# Altium PCB DIOT_Template.PcbDoc (part 3 of 4)
Units mm, origin at the board's own origin, x right, y up, seen from the top; angles counter-clockwise.
Board outline 222.9 x 100 mm, 4 copper layers (L1, P2, P3, L4), stack 1.546 mm thick; 233 components, 184 nets, 1067 pads, 325 vias.
Unrouted connection lines stored in the file: 423.
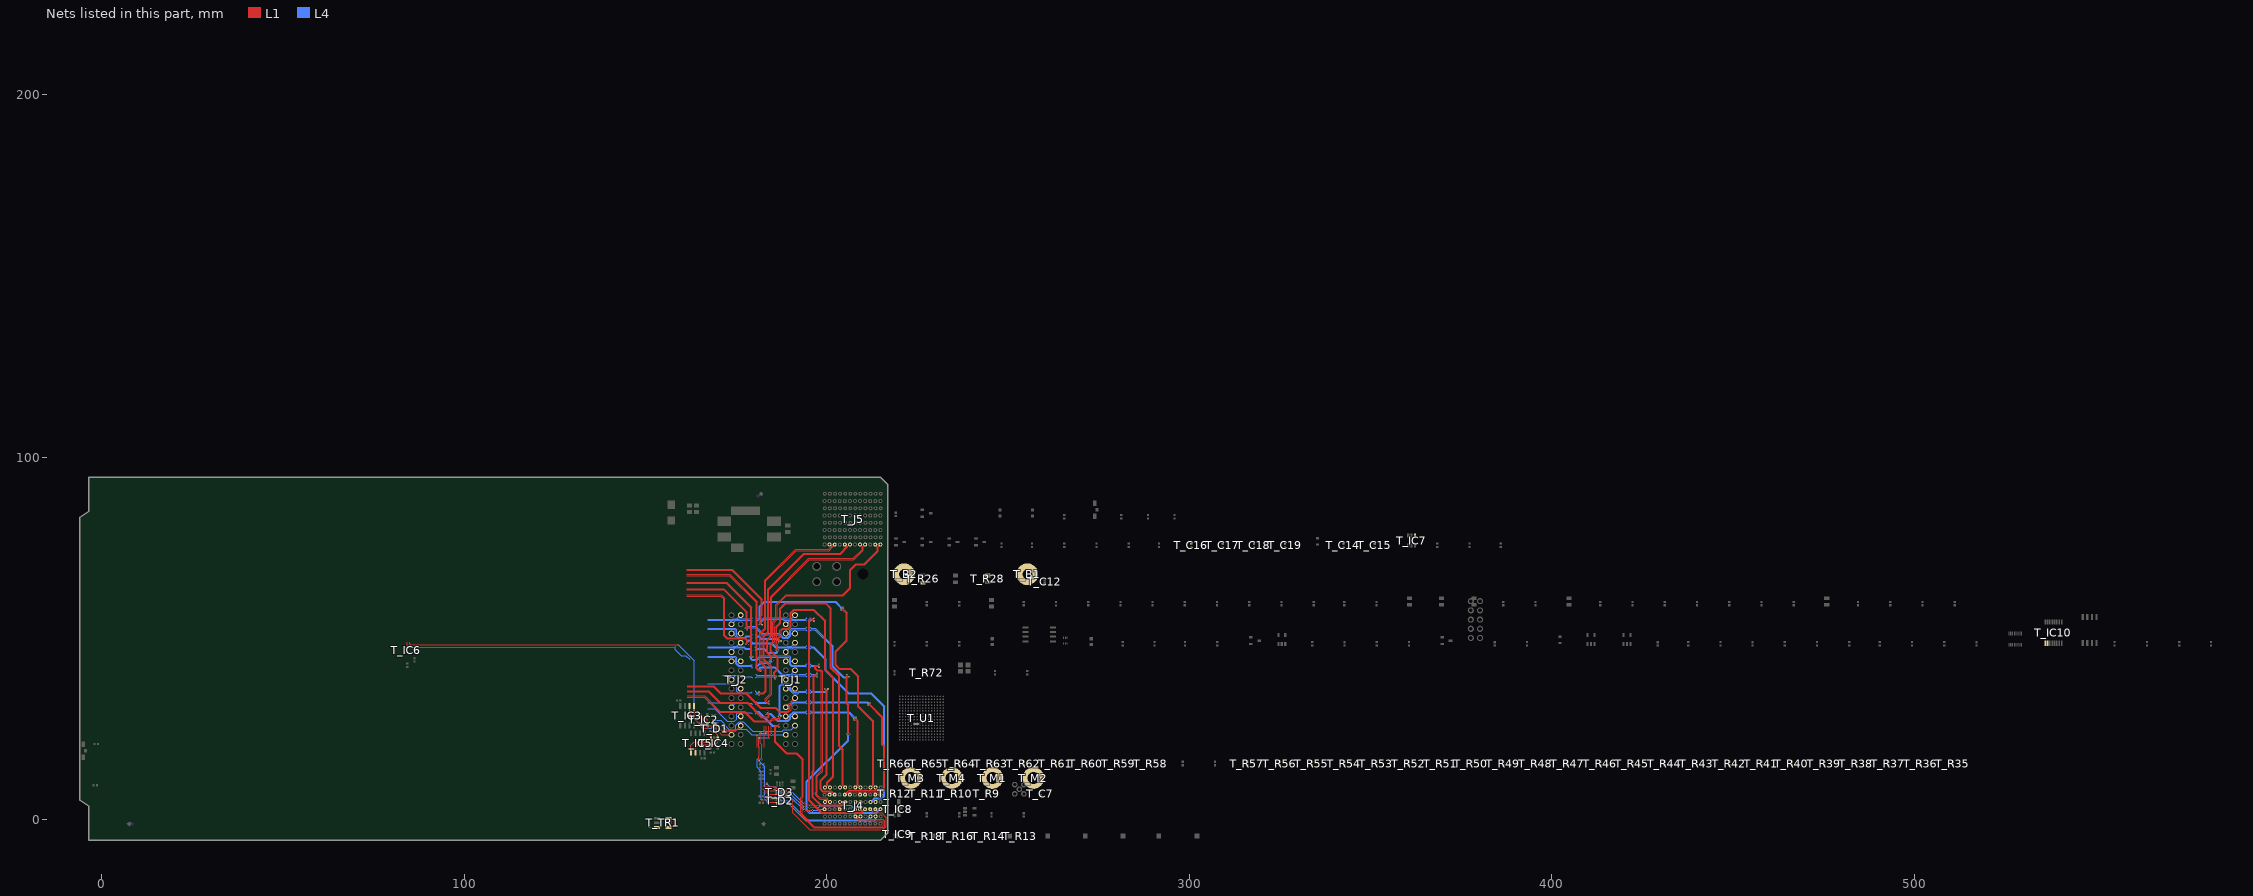
[diagram p4: the nets of this part, all layers, seen from the top]

## Via types
v1: diameter 0.5, hole 0.25, L1 to L4, tented both sides, 289 vias
v2: diameter 1, hole 0.45, L1 to L4, tented both sides, 28 vias
v3: diameter 0.9, hole 0.45, L1 to L4, tented both sides, 5 vias
v4: diameter 0.6, hole 0.3, L1 to L4, tented both sides, 3 vias

## Nets (pads, with @x,y where several pads share a name; then routed paths per layer and width w, separated by ;. In a path a pad name is that pad's centre, name@x,y a point inside that pad or via, vN(x,y) a via of type N, cw(c..) or ccw(c..) an arc to the next point about the centre after c; other vN are vias at no path point) (continued)
BP_IO.LVDS_P7: T_J4.E6 T_R42.1 | length 33.2
  L1 w0.14: v1(208.094,28.236) 208.111,28.219 208.111,27.883 208.751,27.243 208.751,18.384 208.751,9.5 T_J4.E6@209.3,8.95
  L4 w0.14: 195.47,30.134 195.47,30.114 195.77,29.814 206.18,29.814 207.74,28.253 208.076,28.253 v1(208.094,28.236)
BP_IO.LVDS_P8: T_J4.B6 T_R43.1 | length 86.5
  L1 w0.14: v1(204.536,58.536) 204.553,58.519 204.553,58.183 205.659,57.077 205.659,49.406 202.6,46.347 202.6,42.721 203.521,41.8 206.681,41.8 208.9,39.581 208.9,31.3 212.951,27.249 212.951,9.5 T_J4.B6@213.5,8.95
  L4 w0.14: 180.47,55.74 180.47,55.72 180.77,55.42 181.029,55.42 181.386,55.778 181.386,58.9 182.775,60.288 202.447,60.288 204.182,58.554 204.518,58.554 v1(204.536,58.536)
BP_IO.LVDS_P9: T_J4.K6 T_R44.1 | length 77.6
  L1 w0.14: v1(186.8,48.9) 186.781,48.919 186.781,49.251 186.577,49.456 186.577,50.301 187.1,50.824 187.1,52.24 187.73,52.87 189.37,52.87 189.9,53.4 189.9,57.185 190.876,58.161 196.439,58.161 199.695,54.905 199.695,41.505 202,39.2 202,11.881 200.351,10.232 200.351,9.5 T_J4.K6@200.9,8.95
  L4 w0.14: 180.37,50.2 180.37,50.22 180.67,50.52 181.156,50.52 181.876,49.8 186.276,49.8 186.803,49.273 186.803,48.903 v1(186.8,48.9)
BP_IO.LVDS_P10: T_J4.H6 T_R45.1 | length 86
  L1 w0.14: v1(186.025,46.8) 186.025,46.825 186.263,47.062 186.263,48.073 185.865,48.471 185.865,53.189 187,54.324 187,58.324 188.564,59.888 199.801,59.888 201.29,58.399 201.29,42.01 203.6,39.7 203.6,20.4 204.55,19.45 204.55,9.409 205.009,8.95 T_J4.H6@205.1,8.95
  L4 w0.14: 180.264,47.701 180.264,47.681 180.561,47.384 182.716,47.384 182.892,47.208 183.8,46.3 186.176,46.3 186.263,46.387 186.263,46.538 186.025,46.775 v1(186.025,46.8)
BP_IO.LVDS_P11: T_J5.D1 T_R46.1 | length 56.5
  L1 w0.14: v1(185.045,43.885) 185.045,43.942 184.839,44.147 184.839,45.058 183.707,46.189 183.707,49.607 184.8,50.7 184.8,61.4 195.2,71.8 207.452,71.8 210.051,74.399 210.051,75.387 210.051,75.503 210.498,75.95 T_J5.D1@210.6,75.95
  L4 w0.14: 180.366,41.988 180.366,42.016 180.59,42.24 180.618,42.24 180.729,42.351 181.051,42.351 181.968,43.268 184.433,43.268 v1@185.045,43.88
BP_IO.LVDS_P12: T_J5.A1 T_R47.1 | length 67.1
  L1 w0.14: v1(186.248,39.548) 186.179,39.617 185.914,39.617 185.7,39.831 185.7,40.6 186.6,41.5 186.6,44.743 184.7,46.643 184.7,48.3 185.47,49.07 185.47,54.565 186.3,55.395 186.3,59.2 188.9,61.8 204.5,61.8 206.6,63.9 206.6,68.9 208.1,70.4 210.5,70.4 214.251,74.151 214.251,75.4 T_J5.A1@214.801,75.95
  L4 w0.14: 180.378,40.132 180.378,40.112 180.666,39.825 185.635,39.825 185.895,39.565 186.231,39.565 v1(186.248,39.548)
BP_IO.LVDS_P13: T_J5.J1 T_R48.1 | length 58.4
  L1 w0.14: v1(181.32,34.528) 181.344,34.528 181.582,34.766 182.651,34.766 183.388,35.503 183.388,42.136 181.9,43.624 181.9,51.4 183.2,52.7 183.2,65.928 191.567,74.295 200.645,74.295 201.651,75.301 201.651,75.541 202.06,75.95 T_J5.J1@202.2,75.95
  L4 w0.14: 180.378,34.671 180.583,34.671 180.678,34.766 181.058,34.766 181.295,34.528 v1(181.32,34.528)
BP_IO.LVDS_P14: T_J5.G1 T_R49.1 | length 65.2
  L1 w0.14: v1(184.179,32.75) 184.094,32.75 184.094,32.688 183.906,32.5 183.593,32.5 183.4,32.693 183.4,33.273 184.783,34.656 184.783,42.341 182.8,44.324 182.8,50.5 184,51.7 184,63.5 193.8,73.3 203.85,73.3 205.851,75.301 205.851,75.541 206.26,75.95 T_J5.G1@206.401,75.95
  L4 w0.14: 180.5,32.664 180.652,32.512 183.917,32.512 184.155,32.75 v1(184.179,32.75)
BP_IO.LVDS_P15: T_J4.E2 T_R50.2 | length 73.5
  L1 w0.14: v1(186.9,26.375) 186.875,26.375 186.638,26.137 186.088,26.137 185.659,25.709 185.659,21.416 188.861,18.215 191.603,18.215 193.2,16.618 193.2,6.524 192.902,6.227 192.902,1.365 192.99,1.277 196.082,-1.815 ; 196.083,-1.816 196.437,-2.17 215.541,-2.17 215.946,-1.764 215.946,-0.322 215.497,0.127 208.925,0.127 208.75,0.302 208.75,0.541 209.159,0.95 T_J4.E2@209.3,0.95
  L4 w0.14: 180.417,30.074 180.629,30.074 180.677,30.025 180.677,30.017 180.759,29.935 181.289,29.935 185.087,26.137 186.638,26.137 186.875,26.375 v1(186.9,26.375)
BP_MGT.Rx_N: T_J4.E5
BP_MGT.Rx_P: T_J4.D5
BP_MGT.Tx_N: T_J4.B5
BP_MGT.Tx_P: T_J4.A5
CHASSIS: T_B1.1 T_B2.1 T_C12.1 T_M1.1 T_M2.1 T_M3.1 T_M4.1 T_R26.1 T_R28.2
CLK_25MHz: T_R72.2 T_U1.K9
CT: T_C14.2 T_C15.2 T_C16.2 T_C17.2 T_C18.2 T_C19.2 T_IC7.4
EEM0_I2C.SCL: T_D1.3 T_IC2.1 T_IC3.6 T_IC6.1 T_IC8.3 T_IC9.6 T_IC10.2 T_J1.27 | length 120.9
  L1 w0.125: 84.324,48.983 84.324,47.976 84.624,47.676 v1(158.217,47.676) ; T_IC3.6@162.163,31.417 162.163,29.94 v1(162.161,29.938) 162.161,29.289 164.736,26.714 164.913,26.714 165.387,26.239 165.387,25.694 165.78,25.302 167.198,25.302 v1(167.2,25.3) ; 169.6,25.96 169.6,26.609 169.937,26.946 v1(169.961,26.946) ; 169.605,25.965 170.641,25.965 v1(170.658,25.982) ; 180.792,19.985 180.812,20.005 v1(180.811,23.497) v1(180.811,23.497) ; 184.692,25.785 184.698,25.78 v1(184.698,23.52)
  L4 w0.125: v1(158.217,47.676) 158.217,46.983 159.9,45.3 161.1,45.3 162.161,44.239 ; v1(167.2,25.3) 168.2,25.3 169.719,26.819 169.732,26.819 169.859,26.946 v1(169.961,26.946) ; v1@170.658,26.034 v1(170.658,25.982) 171.079,25.982 172.537,24.524 174.875,24.524 175.288,24.938 176.269,24.938 ccw(c176.27,26) 176.271,24.938 177.862,24.938 179.31,23.49 180.804,23.49 v1(180.811,23.497) 184.675,23.497 v1(184.698,23.52) 184.759,23.46 T_J1.27@188.73,23.46
EEM0_I2C.SDA: T_D1.1 T_IC2.3 T_IC3.5 T_IC6.6 T_IC8.2 T_IC9.7 T_IC10.1 T_J1.26 | length 138.9
  L1 w0.125: 84.97,48.987 84.97,48.473 85.132,48.311 v1(159.03,48.311) ; T_IC3.5@163.433,31.417 163.433,29.933 v1(163.4,29.9) 163.4,29.3 164.6,28.1 166.6,28.1 167.05,27.65 167.05,26.155 167.287,25.917 168.5,25.917 ; 168.6,25.96 168.587,25.973 168.587,27.48 v1(168.63,27.523) ; 182.742,19.985 182.768,20.011 v1(182.768,24.511) 182.768,25.76 182.742,25.785
  L4 w0.125: v1(159.03,48.311) 163.416,43.924 v1@163.416,29.9 ; v1(163.4,29.9) v1@163.416,29.916 ; v1(168.63,27.523) 168.643,27.51 170.79,27.51 172,26.3 172,25.962 173.062,24.9 174.6,24.9 174.9,25.2 174.9,26.133 175.88,27.113 176.987,27.113 179.614,24.486 182.768,24.486 187.8,24.486 188.214,24.9 190.17,24.9 T_J1.26@191.27,26
EEM1_I2C.SCL: T_D1.6 T_IC4.1 T_IC5.6 T_J2.27 | length 16
  L1 w0.15: T_IC5.6@163.799,18.475 163.799,19.799 164.81,20.81 169.41,20.81 169.95,21.35 T_IC4.1@169.95,22.5 169.95,23.348 169.599,23.699 169.599,24.484 170.065,24.484 171.089,23.46 T_J2.27@173.73,23.46
EEM1_I2C.SDA: T_D1.4 T_IC4.3 T_IC5.5 T_J2.26 | length 20.7
  L1 w0.15: T_IC5.5@162.529,18.475 162.529,20.629 163.3,21.4 167.159,21.4 167.784,22.025 167.825,22.025 168.05,22.25 168.05,23.244 168.596,23.791 T_D1.4@168.596,24.436 ; v1(167.9,24.5) 167.946,24.454 168.586,24.454 T_D1.4@168.6,24.44 ; v1(170.6,25) 170.689,25 170.945,24.744 175.014,24.744 T_J2.26@176.27,26
  L4 w0.15: v1(167.9,24.5) 170.1,24.5 v1(170.6,25)
EEM_CLK_N: T_R10.2 T_TR1.1 | length 1.8
  L1 w0.14: T_TR1.1@156.39,0.47 156.691,0.169 157.681,0.169 157.93,-0.08 157.93,-0.1
EEM_CLK_P: T_R9.2 T_TR1.3 | length 1.8
  L1 w0.14: T_TR1.3@156.39,-2.07 156.835,-2.07 157.193,-1.712 157.638,-1.712 157.93,-1.42 157.93,-1.4
EEM_CLK_SE: T_C7.1 T_TR1.4 | length 2.3
  L1 w0.14: 150.87,-2.07 T_TR1.4@153.21,-2.07
EEM_IO.LVDS_N0: T_J1.3 T_R51.2 | length 47.3
  L1 w0.14: 161.4,69.196 173.904,69.196 182.2,60.9 182.2,56.5 181.937,56.237 181.937,54.062 182.175,53.825 v1(182.175,53.8)
  L4 w0.14: v1(182.175,53.8) 182.175,53.825 181.937,54.062 181.937,54.537 182.795,55.395 187.878,55.395 188.163,55.11 189.868,55.11 189.971,55.007 ; T_J1.3@188.73,53.94 188.904,53.94 189.971,55.007 ; 194.53,54.9 194.45,54.9 194.258,55.092 193.392,55.092 190.056,55.092 189.971,55.007
EEM_IO.LVDS_N1: T_J1.6 T_R52.2 | length 46.6
  L1 w0.14: 161.4,63.785 171.662,63.785 178.117,57.33 178.117,53.512 178.306,53.323 178.306,52.959 178.112,52.764 178.112,52.428 v1(178.094,52.411)
  L4 w0.14: v1(178.094,52.411) 178.112,52.428 178.112,52.764 178.397,53.05 180.35,53.05 182.279,51.121 186.779,51.121 187.848,50.052 189.412,50.052 190.15,50.79 190.15,51.318 190.232,51.4 T_J1.6@191.27,51.4 191.262,51.408 190.342,51.408 190.15,51.6 190.15,52.15 190.493,52.493 194.257,52.493 194.53,52.22 194.53,52.2
EEM_IO.LVDS_N2: T_J1.9 T_R53.2 | length 48.9
  L1 w0.14: 161.4,62.048 170.943,62.048 171.852,61.139 171.852,50.978 172.53,50.3 177.524,50.3 178.263,49.562 178.263,48.862 178.5,48.625 v1(178.5,48.6)
  L4 w0.14: v1(178.5,48.6) 178.5,48.625 178.263,48.862 178.263,49.192 178.461,49.39 178.733,49.39 179.523,48.6 184.676,48.6 185.786,47.49 189.306,47.49 189.44,47.624 189.754,47.624 189.836,47.542 189.836,47.426 ; T_J1.9@188.73,46.32 189.836,47.426 ; 194.53,47.3 194.439,47.3 194.239,47.5 190.73,47.5 190.486,47.256 190.122,47.256 189.952,47.426 189.836,47.426
EEM_IO.LVDS_N3: T_J1.12 T_R54.2 | length 54.5
  L1 w0.14: 161.4,65.581 172.406,65.581 179.339,58.648 179.339,45.22 179.553,45.006 v1(179.553,44.958)
  L4 w0.14: v1(179.553,44.958) 179.553,44.933 179.315,44.696 179.315,44.37 179.397,44.288 180.764,44.288 181.687,45.212 189.727,45.212 190.1,44.838 190.1,43.915 190.225,43.79 ; T_J1.12@191.27,43.78 190.182,43.78 190.1,43.698 190.1,42.9 190.3,42.7 194.172,42.7 194.232,42.76 194.31,42.76 194.53,42.98 194.53,43 194.53,43.08
EEM_IO.LVDS_N4: T_J1.15 T_R55.2 | length 59.3
  L1 w0.14: 161.4,67.7 173.284,67.7 180.818,60.166 180.818,41.864 181.222,41.46 181.8,41.46 181.995,41.265 182.331,41.265 v1(182.348,41.248)
  L4 w0.14: v1(182.348,41.248) 182.331,41.265 181.995,41.265 181.8,41.46 181.719,41.46 181.637,41.542 181.637,41.689 181.84,41.892 185.608,41.892 187.666,39.834 189.584,39.834 189.666,39.752 189.666,39.636 ; T_J1.15@188.73,38.7 189.666,39.636 ; 194.53,39.5 194.53,39.52 194.25,39.8 193.781,39.8 190.65,39.8 190.486,39.636 190.122,39.636 189.952,39.806 189.836,39.806 189.666,39.636
EEM_IO.LVDS_N5: T_J1.18 T_R56.2 | length 48.7
  L1 w0.14: 161.481,34.188 166.312,34.188 170.49,30.01 177.39,30.01 180,27.4 184.4,27.4 184.967,27.967 186.808,27.967 186.863,28.022 186.863,28.26 186.62,28.502 v1(186.62,28.6)
  L4 w0.14: v1(186.62,28.6) 186.62,28.619 186.863,28.862 186.863,36.987 187.476,37.6 189.624,37.6 190.15,37.074 190.15,36.242 190.232,36.16 ; T_J1.18@191.27,36.16 190.232,36.16 ; 194.53,35.84 194.53,35.82 194.23,35.52 192.256,35.52 191.886,35.15 190.852,35.15 190.15,35.852 190.15,36.078 190.232,36.16
EEM_IO.LVDS_N6: T_J1.21 T_R57.2 | length 41.6
  L1 w0.14: 161.481,37 168.824,37 170.734,35.09 177.81,35.09 181.79,31.11 185.914,31.11 187.098,29.927 189.296,29.927 189.859,30.49 189.859,31.607 190.034,31.781 190.034,32.104 189.952,32.186 189.836,32.186 T_J1.21@188.73,31.08
  L4 w0.14: T_J1.21@188.73,31.08 189.836,32.186 189.952,32.186 190.122,32.016 190.693,32.016 190.977,32.3 194.25,32.3 194.53,32.02 194.53,32
EEM_IO.LVDS_N7: T_J1.24 T_R58.2 | length 41.7
  L1 w0.14: 161.481,35.6 167.5,35.6 170.65,32.45 176.838,32.45 176.888,32.4 178.2,32.4 182.1,28.5 183.8,28.5 183.898,28.598 183.898,28.999 183.577,29.32 183.206,29.32 v1(183.2,29.314)
  L4 w0.14: v1(183.2,29.314) 183.219,29.295 183.602,29.295 183.754,29.143 184.432,29.143 184.719,28.856 186.422,27.154 189.427,27.154 190.15,27.877 190.15,28.458 190.232,28.54 ; T_J1.24@191.27,28.54 190.232,28.54 ; 194.53,29.194 194.53,29.232 194.212,29.55 190.852,29.55 190.15,28.848 190.15,28.622 190.232,28.54
EEM_IO.LVDS_N8: T_J2.3 T_R59.2 | length 14.2
  L4 w0.14: 167.2,55.056 174.244,55.056 174.353,55.165 174.74,55.165 174.845,55.06 174.845,54.936 ; T_J2.3@173.73,53.94 173.849,53.94 174.845,54.936 ; 179.464,54.889 179.461,54.889 179.221,55.129 175.946,55.129 175.817,55 175.156,55 175.112,55.044 174.953,55.044 174.845,54.936
EEM_IO.LVDS_N9: T_J2.6 T_R60.2 | length 15.6
  L4 w0.14: 167.2,52.87 174.744,52.87 175.158,52.456 175.158,51.474 175.232,51.4 ; T_J2.6@176.27,51.4 175.232,51.4 ; 179.43,51.14 179.43,51.12 179.21,50.9 179.194,50.9 179.117,50.822 177.77,50.822 177.367,50.419 175.557,50.419 175.144,50.831 175.144,51.312 175.232,51.4
EEM_IO.LVDS_N10: T_J2.9 T_R61.2 | length 14.2
  L4 w0.14: 167.2,47.49 174.298,47.49 174.431,47.624 174.752,47.624 174.836,47.54 174.836,47.464 ; T_J2.9@173.73,46.32 174.836,47.426 174.836,47.464 ; 179.337,46.761 179.337,46.781 179.016,47.102 177.474,47.102 177.157,47.419 175.075,47.419 175.03,47.464 174.836,47.464
EEM_IO.LVDS_N11: T_J2.12 T_R62.2 | length 15.4
  L4 w0.14: 167.2,45.2 174.79,45.2 175.187,44.803 175.187,43.855 175.262,43.78 ; T_J2.12@176.27,43.78 175.262,43.78 ; 179.426,42.723 179.233,42.723 179.13,42.62 177.18,42.62 177.154,42.646 175.71,42.646 175.18,43.176 175.18,43.698 175.262,43.78
EEM_IO.LVDS_N12: T_J2.15 T_R63.2 | length 11.8
  L4 w0.14: 171.311,39.847 174.567,39.847 174.649,39.765 174.649,39.649 173.876,38.876 ccw(c173.975,38.777) T_J2.15@173.867,38.866 ; T_J2.15@173.729,38.729 173.435,38.729 173.569,38.863 T_J2.15@173.863,38.863 ; T_J2.15@173.73,38.7 174.879,39.849 177.158,39.849 177.482,39.525 179.151,39.525 179.438,39.238 179.438,39.218
EEM_IO.LVDS_N13: T_J2.18 T_R64.2 | length 15.4
  L4 w0.14: 167.2,37.548 174.7,37.548 175.15,37.098 175.15,36.266 175.283,36.133 ; T_J2.18@176.27,36.16 175.31,36.16 175.283,36.133 ; 179.438,35.341 179.156,35.058 175.566,35.058 175.166,35.458 175.166,36.016 175.283,36.133
EEM_IO.LVDS_N14: T_J2.21 T_R65.2 | length 14
  L4 w0.14: 167.2,32.25 174.587,32.25 174.669,32.168 174.669,32.019 T_J2.21@173.73,31.08 ; 174.703,32.053 174.829,32.179 179.098,32.179 179.137,32.14 179.21,32.14 179.464,31.886 179.464,31.77
EEM_IO.LVDS_N15: T_J2.24 T_R66.1 | length 16.9
  L4 w0.14: 167.2,30.6 169.113,30.6 172.576,27.137 174.531,27.137 175.15,27.757 175.15,28.458 175.232,28.54 ; T_J2.24@176.27,28.54 175.232,28.54 ; 179.489,29.261 179.489,29.361 179.25,29.6 175.516,29.6 175.15,29.234 175.15,28.622 175.232,28.54
EEM_IO.LVDS_P0: T_J1.2 T_R35.2 | length 47.1
  L1 w0.14: 161.4,68.896 173.78,68.896 181.9,60.776 181.9,56.624 181.638,56.362 181.638,54.062 181.4,53.825 v1(181.4,53.8)
  L4 w0.14: v1(181.4,53.8) 181.4,53.825 181.638,54.062 181.638,54.662 182.671,55.695 188.002,55.695 188.287,55.41 190.2,55.41 190.387,55.596 ; T_J1.2@191.27,56.48 190.387,55.596 ; 194.53,55.7 194.53,55.68 194.31,55.46 194.21,55.46 194.142,55.392 190.469,55.392 190.387,55.474 190.387,55.596
EEM_IO.LVDS_P1: T_J1.5 T_R36.2 | length 46.1
  L1 w0.14: 161.4,63.485 171.538,63.485 177.817,57.206 177.817,53.388 178.006,53.199 178.006,53.083 177.899,52.976 177.564,52.976 v1(177.546,52.959)
  L4 w0.14: v1(177.546,52.959) 177.564,52.976 177.899,52.976 178.273,53.35 180.474,53.35 182.403,51.421 186.903,51.421 187.973,50.352 189.287,50.352 189.85,50.914 189.85,51.318 189.768,51.4 T_J1.5@188.73,51.4 188.738,51.408 189.658,51.408 189.85,51.6 189.85,52.274 190.369,52.793 194.243,52.793 194.53,53.08 194.53,53.1
EEM_IO.LVDS_P2: T_J1.8 T_R37.2 | length 48.9
  L1 w0.14: 161.4,61.748 170.819,61.748 171.552,61.015 171.552,50.854 172.405,50 177.4,50 177.963,49.437 177.963,48.889 ; v1(177.725,48.6) 177.725,48.625 177.963,48.862
  L4 w0.14: v1(177.725,48.6) 177.725,48.625 177.963,48.862 177.963,49.316 178.337,49.69 178.857,49.69 179.647,48.9 184.8,48.9 185.91,47.79 189.182,47.79 189.316,47.924 189.878,47.924 190.048,47.754 190.164,47.754 ; T_J1.8@191.27,48.86 190.164,47.754 ; 194.53,48.08 194.53,48.069 194.261,47.8 190.606,47.8 190.362,47.556 190.246,47.556 190.164,47.638 190.164,47.754
EEM_IO.LVDS_P3: T_J1.11 T_R38.2 | length 54.2
  L1 w0.14: 161.4,65.281 172.282,65.281 179.039,58.524 179.039,45.22 v1(178.778,44.958)
  L4 w0.14: v1(178.778,44.958) 178.778,44.933 179.015,44.696 179.015,44.246 179.273,43.988 180.888,43.988 181.812,44.912 189.602,44.912 189.8,44.714 189.8,43.884 189.696,43.78 ; T_J1.11@188.73,43.78 189.696,43.78 ; 194.53,42.2 194.45,42.2 194.25,42.4 190.176,42.4 189.8,42.776 189.8,43.676 189.696,43.78
EEM_IO.LVDS_P4: T_J1.14 T_R39.2 | length 59.8
  L1 w0.14: 161.4,67.4 173.16,67.4 180.518,60.042 180.518,41.74 181.098,41.16 181.676,41.16 181.783,41.053 181.783,40.717 v1(181.8,40.7)
  L4 w0.14: v1(181.8,40.7) 181.783,40.717 181.783,41.053 181.676,41.16 181.595,41.16 181.337,41.418 181.337,41.813 181.716,42.192 185.732,42.192 187.79,40.134 190.164,40.134 ; T_J1.14@191.27,41.24 190.164,40.134 ; 194.53,40.4 194.53,40.38 194.25,40.1 193.905,40.1 190.526,40.1 190.362,39.936 190.246,39.936 190.164,40.018 190.164,40.134
EEM_IO.LVDS_P5: T_J1.17 T_R40.2 | length 48.7
  L1 w0.14: 161.481,33.888 166.188,33.888 170.366,29.71 177.266,29.71 179.876,27.1 184.524,27.1 185.092,27.667 186.933,27.667 187.162,27.897 187.163,28.301 187.394,28.533 v1(187.394,28.63)
  L4 w0.14: v1(187.394,28.63) 187.394,28.661 187.163,28.892 187.163,36.863 187.6,37.3 189.5,37.3 189.85,36.95 189.85,36.242 189.768,36.16 ; T_J1.17@188.73,36.16 189.768,36.16 ; 194.53,34.9 194.53,34.92 194.23,35.22 192.381,35.22 192.011,34.85 190.727,34.85 189.85,35.727 189.85,36.078 189.768,36.16
EEM_IO.LVDS_P6: T_J1.20 T_R41.2 | length 42.1
  L1 w0.14: 161.481,36.7 168.7,36.7 170.61,34.79 177.686,34.79 181.666,30.81 185.79,30.81 186.973,29.627 189.42,29.627 190.159,30.365 190.159,31.482 190.334,31.657 190.334,32.228 190.164,32.398 190.164,32.514 T_J1.20@191.27,33.62
  L4 w0.14: T_J1.20@191.27,33.62 190.164,32.514 190.164,32.398 190.246,32.316 190.569,32.316 190.853,32.6 194.25,32.6 194.53,32.88 194.53,32.9
EEM_IO.LVDS_P7: T_J1.23 T_R42.2 | length 42.1
  L1 w0.14: 161.481,35.3 167.376,35.3 170.526,32.15 176.713,32.15 176.763,32.1 178.076,32.1 181.976,28.2 183.924,28.2 184.198,28.474 184.198,29.123 183.796,29.525 183.796,29.814 v1(183.755,29.855)
  L4 w0.14: v1(183.755,29.855) 183.796,29.814 183.796,29.525 183.878,29.443 184.557,29.443 184.9,29.1 186.546,27.454 189.302,27.454 189.85,28.002 189.85,28.458 189.768,28.54 ; T_J1.23@188.73,28.54 189.768,28.54 ; 194.53,30.134 194.53,30.132 194.248,29.85 190.727,29.85 189.85,28.973 189.85,28.622 189.768,28.54
EEM_IO.LVDS_P8: T_J2.2 T_R43.2 | length 14.3
  L4 w0.14: 167.2,55.356 174.119,55.356 174.229,55.465 174.864,55.465 174.947,55.382 175.198,55.382 ; T_J2.2@176.27,56.48 176.218,56.48 175.198,55.46 175.198,55.382 ; 179.464,55.809 179.464,55.654 179.31,55.5 179.299,55.5 179.228,55.429 175.822,55.429 175.693,55.3 175.28,55.3 175.198,55.382
EEM_IO.LVDS_P9: T_J2.5 T_R44.2 | length 15.6
  L4 w0.14: 167.2,52.57 174.62,52.57 174.844,52.346 174.844,51.476 174.768,51.4 ; T_J2.5@173.73,51.4 174.768,51.4 ; 179.438,50.188 179.438,50.212 179.21,50.44 179.194,50.44 179.112,50.522 177.894,50.522 177.491,50.119 175.432,50.119 174.844,50.707 174.844,51.324 174.768,51.4
EEM_IO.LVDS_P10: T_J2.8 T_R45.2 | length 14.1
  L4 w0.14: 167.2,47.79 174.173,47.79 174.307,47.924 174.876,47.924 174.948,47.852 175.152,47.852 175.23,47.93 ; T_J2.8@176.27,48.86 176.16,48.86 175.23,47.93 ; 179.324,47.701 179.324,47.681 179.045,47.402 177.598,47.402 177.281,47.719 175.312,47.719 175.23,47.801 175.23,47.93
EEM_IO.LVDS_P11: T_J2.11 T_R46.2 | length 15.7
  L4 w0.14: 167.2,44.9 174.666,44.9 174.887,44.679 174.887,43.862 174.805,43.78 174.798,43.78 ; T_J2.11@173.73,43.78 174.798,43.78 ; 179.426,41.803 179.426,42.024 179.13,42.32 177.056,42.32 177.03,42.346 175.585,42.346 174.88,43.051 174.88,43.698 174.798,43.78